# EAGLE board AS5147 (EAGLE 9.2.2)
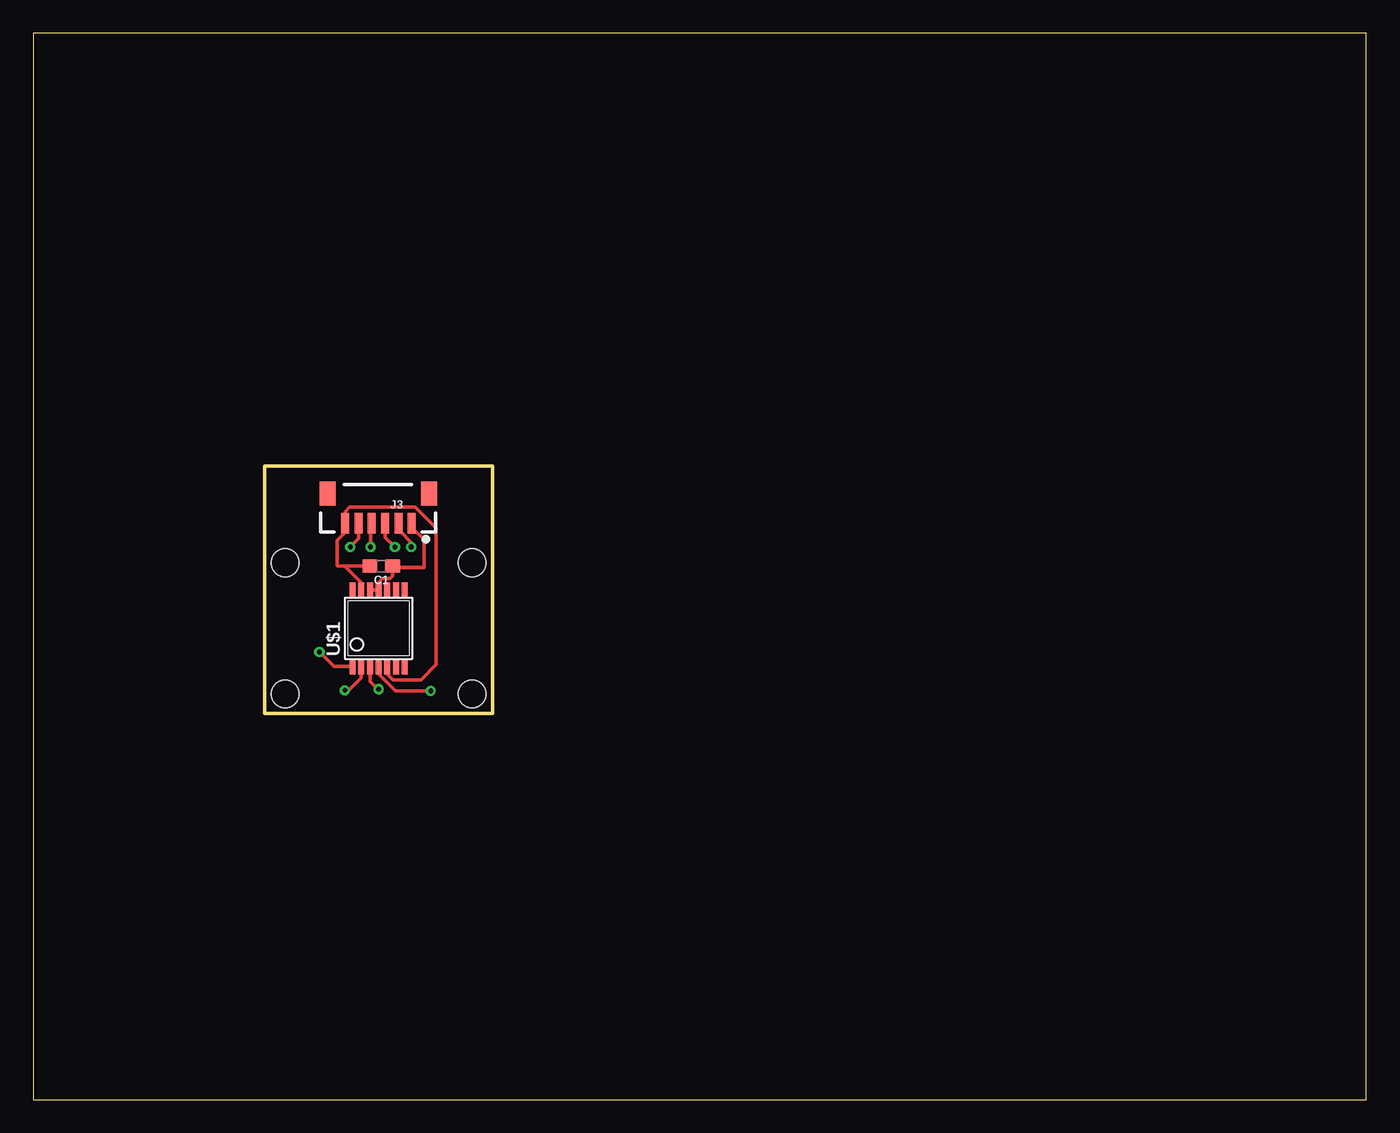
[diagram p0: board, top side]
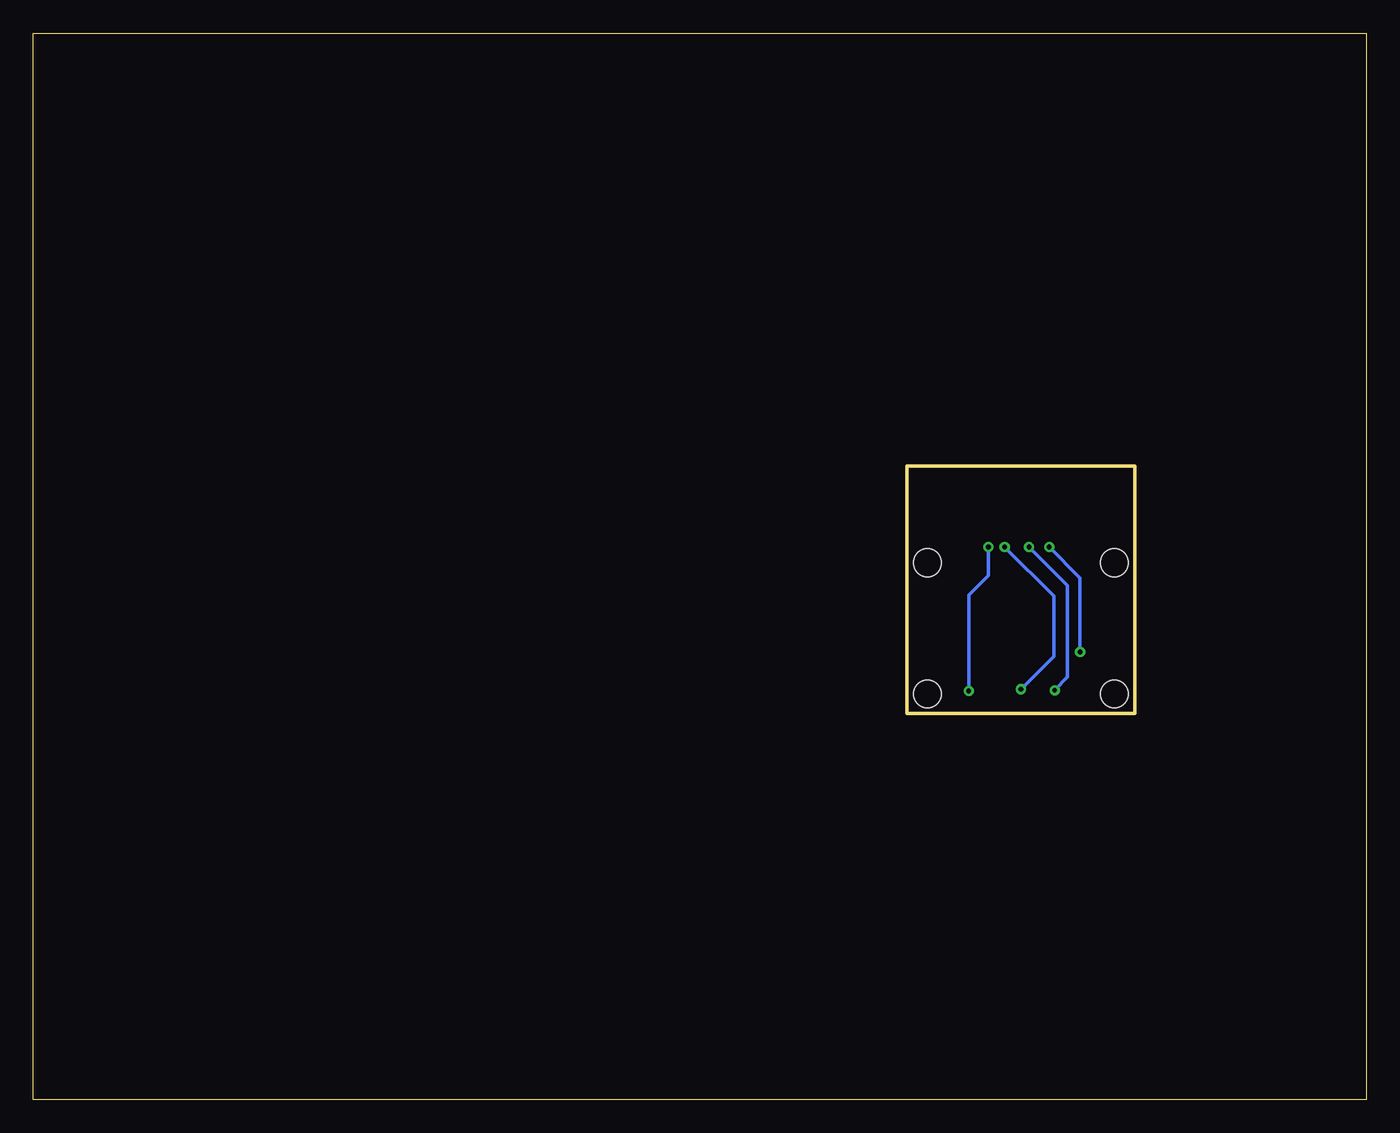
[diagram p1: board, bottom side, seen from below]

Size 100 x 80 mm. Coordinates in mm from the lower left corner, seen from the top.
Outline: 0,0 100,0 100,80 0,80 0,0
Outline: 17.37,47.55 17.37,28.96 34.44,28.96 34.44,47.55 17.37,47.55
Copper layers (1*16): Top 0.035mm / dielectric 1.5mm / Bottom 0.035mm
Design rules "default": minimum track width 6mil, minimum drill 0.35mm, track to track 6mil, track to pad 6mil, pad to pad 6mil, via to via 6mil, smd to smd 6mil, copper to edge 40mil, drill to drill 6mil, minimum pad ring 10mil, minimum via ring 8mil, stop-mask expansion 4mil, vias tented up to drill 0mil, thermal gap 10mil
Holes 2.1 mm at 32.92,40.28 32.92,30.43 18.9,40.28 18.9,30.43

## Footprints (pad centres in the part's own frame; a part is rotated, then mirrored left to right if it is on the bottom)
0603 = smd 1.1 x 1: 1 -0.85,0; 2 0.85,0
1X06-1MM = smd 0.6 x 1.55: 1 -2.54,1.27; 2 -1.54,1.27; 3 -0.54,1.27; 4 0.46,1.27; 5 1.46,1.27; 6 2.46,1.27 | smd 1.2 x 1.8: P$1 -3.84,-0.955; P$2 3.76,-0.955
TSSOP14 = smd 0.45 x 1.15: 1 -1.95,-2.875; 2 -1.3,-2.875; 3 -0.65,-2.875; 4 0,-2.875; 5 0.65,-2.875; 6 1.3,-2.875; 7 1.95,-2.875; 8 1.95,2.875; 9 1.3,2.875; 10 0.65,2.875; 11 0,2.875; 12 -0.65,2.875; 13 -1.3,2.875; 14 -1.95,2.875

## Placement (x,y rotation side)
C1  0.1uF  [0603]  26.11,40.03 180 top
J3  [1X06-1MM]  25.86,44.5 180 top
U$1  [TSSOP14]  25.91,35.36 0 top

## Library data of the parts
C1 = SparkFun-Capacitors; PROD_ID: CAP-08604
J3 = SparkFun-Connectors; PROD_ID: CONN-08249; SF_ID: GPS-00579
U$1 = u_angle_sensor_ams_as5147_tssop14

## Nets
3.3V: C1.1 J3.1 U$1.11 U$1.12
CLK: J3.4 U$1.2
CS: J3.5 U$1.1
GND: C1.2 J3.6 U$1.5 U$1.13
MISO: J3.3 U$1.3
MOSI: J3.2 U$1.4

## Tracks (layer width: path | path; a pad name or v marks a point on that pad's centre or on a via)
3.3V
  Top 0.254: J3.1 28.4,42.93 29.31,42.01 29.31,39.93 27.06,39.93 C1.1 26.96,39.28 26.76,39.09 26.22,39.09 25.91,38.78 U$1.11 U$1.12
CLK  (via drill 0.35)
  Top 0.254: J3.4 25.3,43.13 v25.3,41.45 | U$1.2 24.61,31.64 23.67,30.71 v23.37,30.71
  Bottom 0.254: v25.3,41.45 22.4,38.56 22.4,31.7 23.37,30.73 v23.37,30.71
CS  (via drill 0.35)
  Top 0.254: J3.5 24.4,42.08 v23.78,41.46 | U$1.1 22.56,32.48 v21.46,33.58
  Bottom 0.254: v23.78,41.46 21.46,39.14 v21.46,33.58
GND
  Top 0.254: 23.44,40.03 22.83,40.03 22.79,40.08 22.79,41.94 23.4,42.55 J3.6 23.4,44.1 23.75,44.45 28.65,44.45 29.21,43.89 30.23,42.88 30.23,32.64 29.08,31.5 27,31.5 26.56,31.94 U$1.5 | U$1.13 24.61,38.79 23.44,39.96 23.44,40.03 | C1.2 23.44,40.03
MISO  (via drill 0.35)
  Top 0.254: v27.13,41.45 26.4,42.18 J3.3 | U$1.3 25.26,31.38 25.86,30.79 v25.91,30.79
  Bottom 0.254: v27.13,41.45 23.44,37.77 23.44,33.25 v25.91,30.79
MOSI  (via drill 0.35)
  Top 0.254: J3.2 27.51,43.12 27.51,42.65 28.35,41.81 v28.35,41.45 | U$1.4 25.91,31.94 27.19,30.66 v29.82,30.66
  Bottom 0.254: v28.35,41.45 28.35,39.32 29.82,37.85 v29.82,30.66